# Allegro board ROHM_SENSORSHLD1-EVK-101_BRD_REV01_2015-09-25.brd
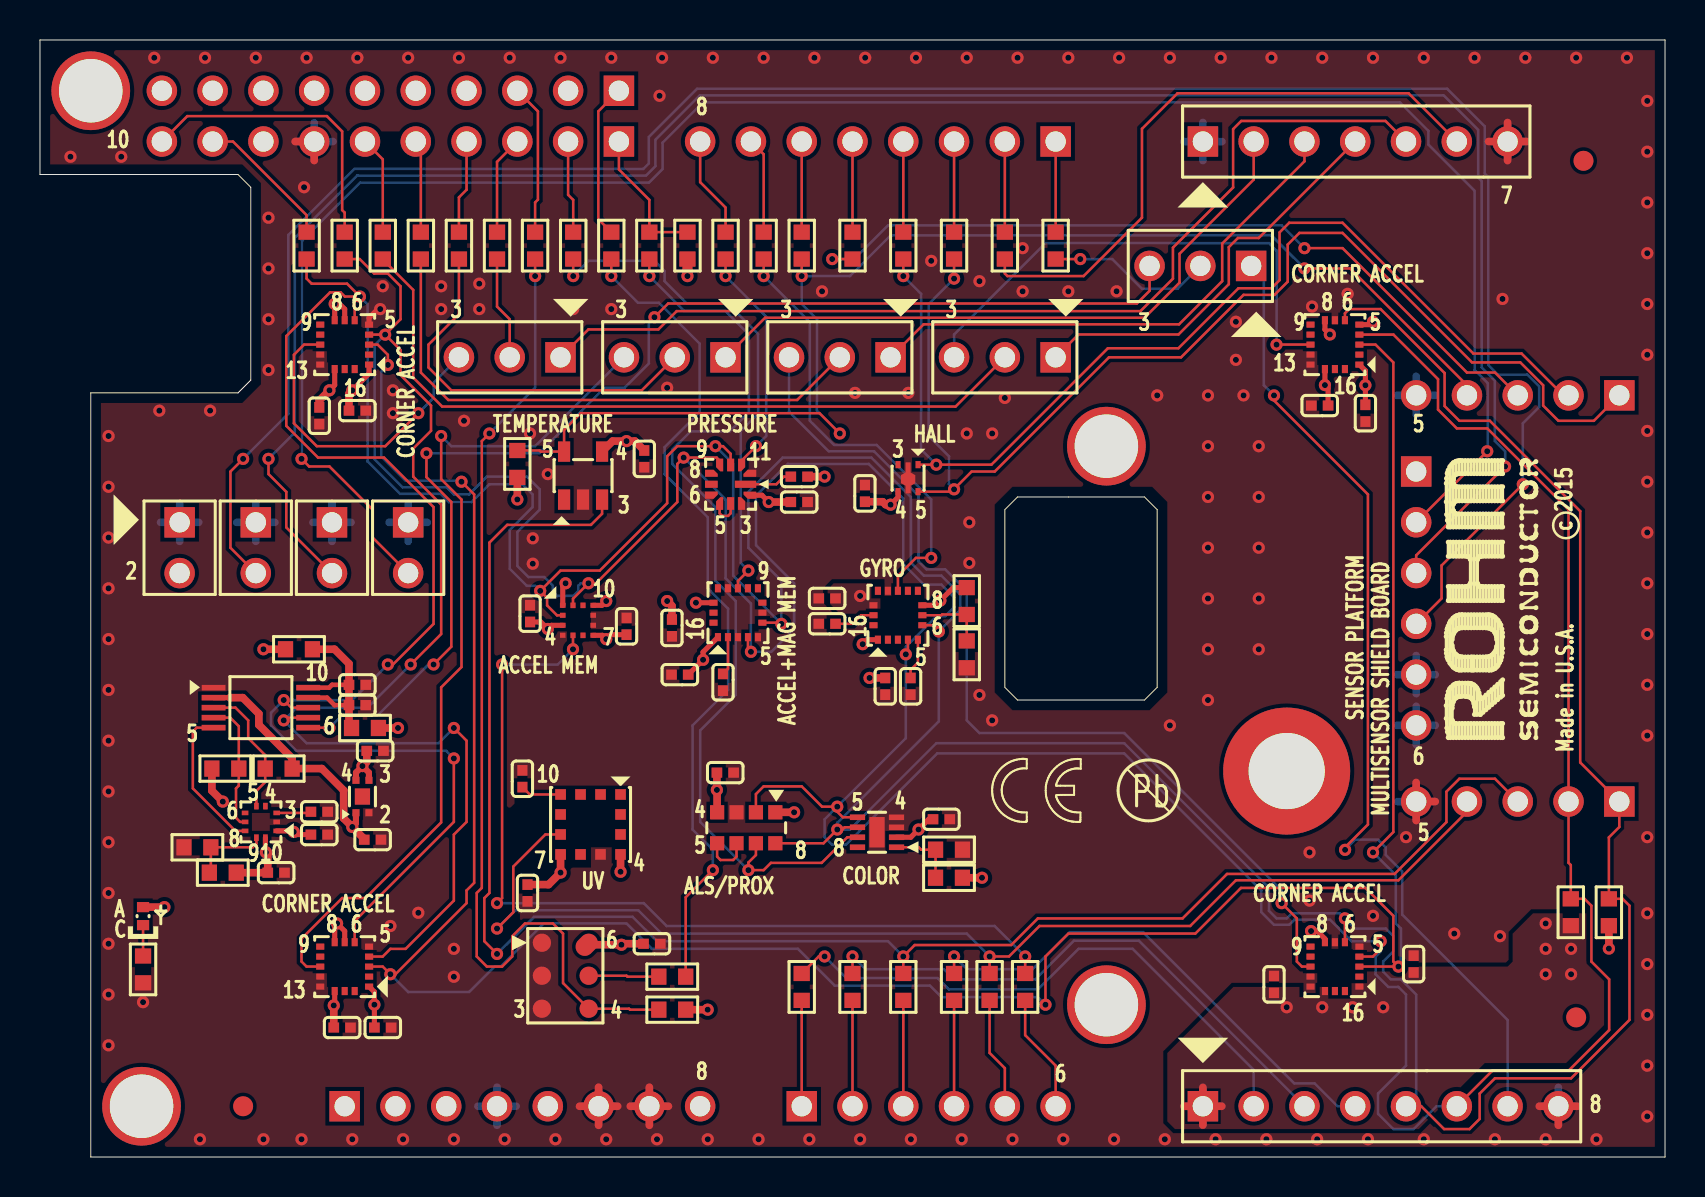
[diagram p0: board, top side]
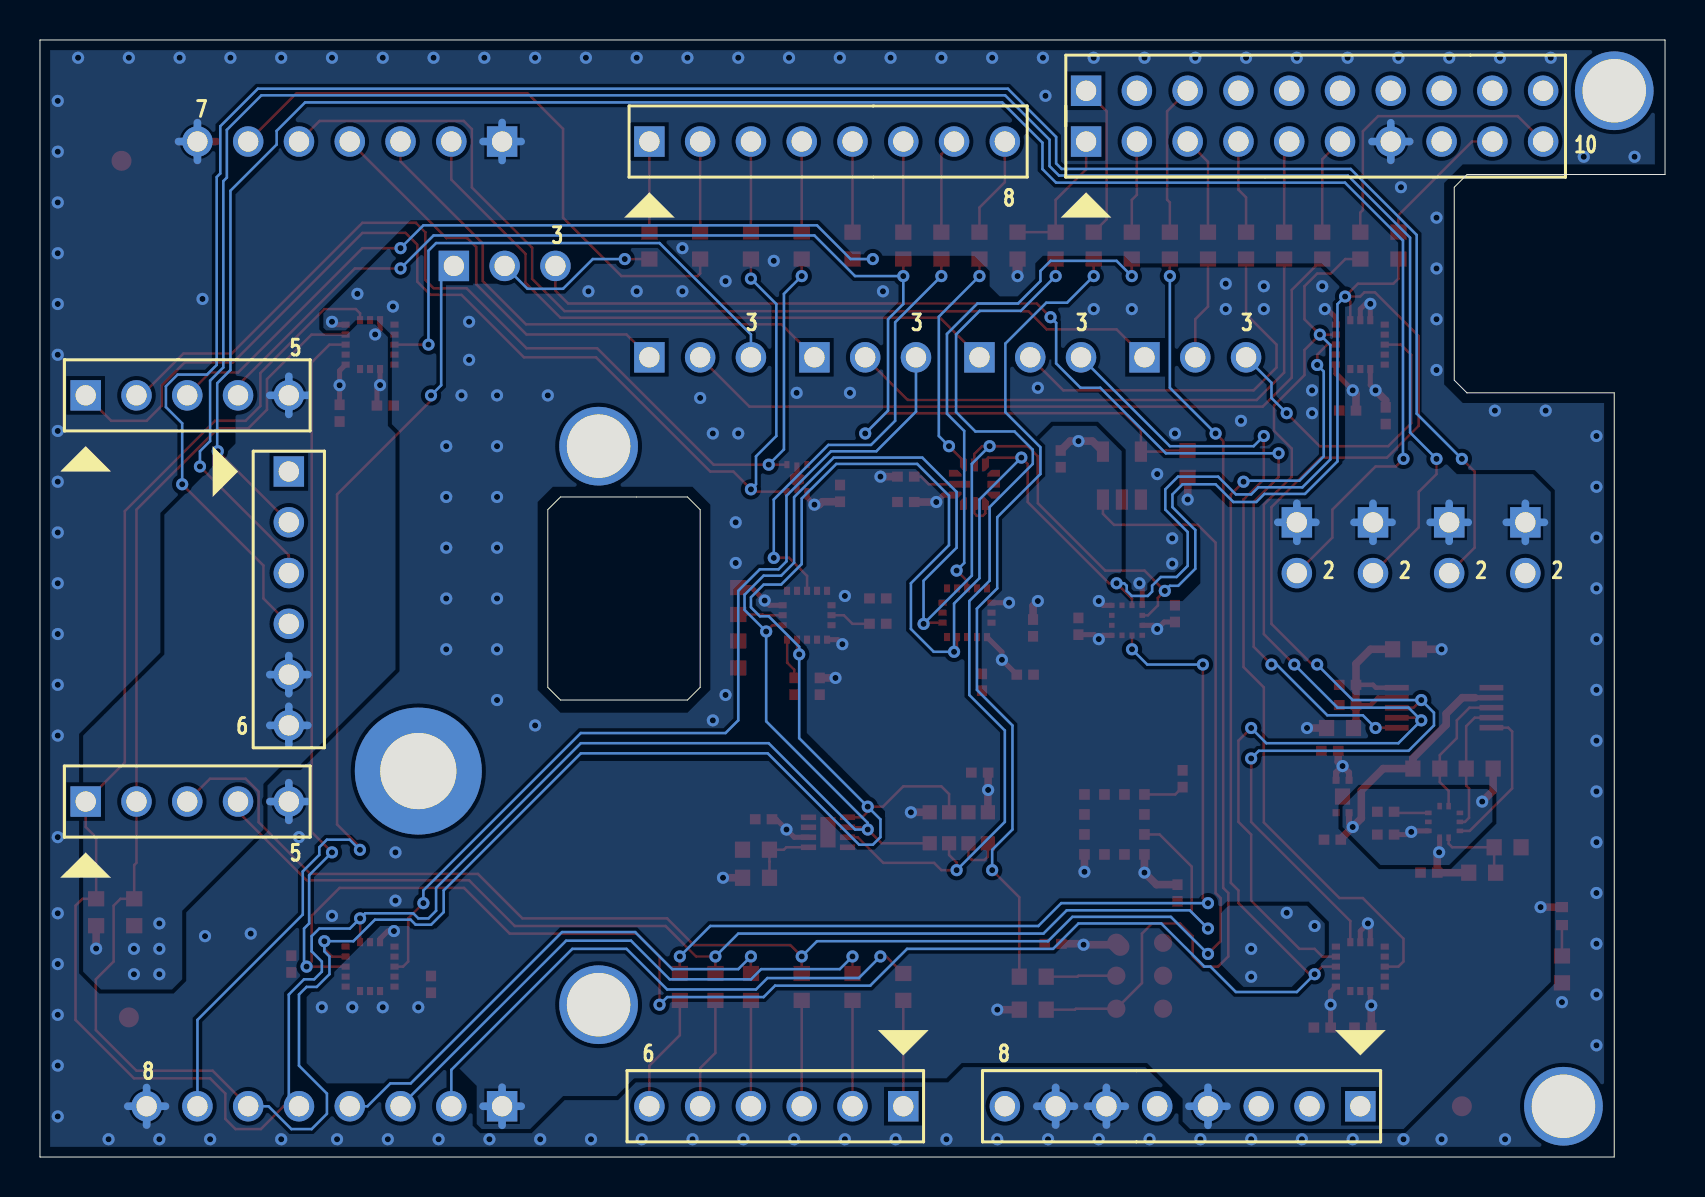
[diagram p1: board, bottom side, seen from below]

Outline 81.28 x 55.88 mm; copper layers: TOP, BOTTOM. Coordinates in mm from the lower left corner of the outline.
Outline path: 0,49.15 0,55.88 81.28,55.88 81.28,0 2.54,0 2.54,38.23 9.91,38.23 10.54,38.86 10.54,48.51 9.91,49.15 0,49.15 ; 48.26,32.38 48.89,33.02 55.24,33.02 55.88,32.38 55.88,23.5 55.24,22.86 48.89,22.86 48.26,23.5 48.26,32.38

## Placement (name value [footprint] x y rotation side)
C1  0.1uF  [C0402]  30.23 34.92 270 top
C2  0.1uF  [C0402]  37.97 34.04 180 top
C3  0.1uF  [C0402]  37.97 32.77 0 top
C5  0.1uF  [C0402]  41.26 33.2 90 top
C6  0.1uF  [C0402]  24.38 13.21 270 top
C7  1nF  [C0402]  24.13 18.92 90 top
C8  0.47uF  [C0402]  34.28 19.23 0 top
C9  0.1uF  [C0402]  45.09 16.9 0 top
C10  0.1uF  [C0402]  32 24.13 180 top
C11  0.1uF  [C0402]  31.61 26.47 270 top
C12  1uF  [C0402]  34.16 23.75 270 top
C13  0.1uF  [C0402]  24.51 27.18 90 top
C14  0.1uF  [C0402]  29.34 26.55 270 top
C17  0.1uF  [C0402]  42.28 23.55 90 top
C19  2.2nF  [C0402]  39.37 26.68 180 top
C21  0.1uF  [C0402]  39.37 27.95 180 top
C22  10nF  [C0402]  43.55 23.55 90 top
C23  0.1uF  [C0402]  30.61 10.67 180 top
C24  0.1uF  [C0402]  15.88 37.34 0 top
C25  0.1uF  [C0402]  13.97 37.08 270 top
C26  0.1uF  [C0402]  17.14 6.48 0 top
C27  0.1uF  [C0402]  15.11 6.48 0 top
C28  0.1uF  [C0402]  68.71 9.65 90 top
C29  0.1uF  [C0402]  61.72 8.64 90 top
C30  0.1uF  [C0402]  66.29 37.21 270 top
C31  0.1uF  [C0402]  64.01 37.59 180 top
C32  1uF  [C0402]  13.97 16.13 180 top
C33  1uF  [C0402]  11.81 14.22 180 top
C34  1uF  [C0402]  13.97 17.27 180 top
C35  1uF  [C0402]  16.76 20.32 180 top
C36  1uF  [C0402]  15.88 23.62 0 top
C37  1uF  [C0402]  16.64 15.88 180 top
C38  1uF  [C0402]  15.88 22.61 0 top
D1  SML-P11VTT86  [LED0402]  5.16 12.05 90 top
H1  SensorInterfaceHeader_1  [HDR_THVT_1X5_100]  78.99 38.1 180 bottom
H2  SensorInterfaceHeader_2  [HDR_THVT_1X5_100]  78.99 17.78 180 bottom
H3  SensorInterfaceHeader_3  [HDR_THVT_1X6_100]  68.83 34.29 270 bottom
H4  Header_Ard_Power  [HDR_THVT_1X8_100]  15.24 2.54 0 bottom
H5  Header_Ard_AnalogIn  [HDR_THVT_1X6_100]  38.1 2.54 0 bottom
H6  Header_Ard_Digital1  [HDR_THVT_1X8_100]  50.8 50.8 180 bottom
H7  Header_Ard_Digital2  [HDR_THVT_1X10_100]  28.96 50.8 180 bottom
H8  ExpansionHeader_I2C+ADC  [HDR_THVT_1X8_100]  58.17 2.54 0 top
H9  ExpansionHeader_SPI  [HDR_THVT_1X7_100]  58.17 50.8 0 top
H10  Header_Ard_Digital2_TopSide  [HDR_THVT_1X10_100]  28.96 53.34 180 bottom
H11  3PinHeader  [HDR_THVT_1X3_100]  26.04 40.01 180 top
H12  3PinHeader  [HDR_THVT_1X3_100]  34.29 40.01 180 top
H13  3PinHeader  [HDR_THVT_1X3_100]  42.55 40.01 180 top
H14  3PinHeader  [HDR_THVT_1X3_100]  50.8 40.01 180 top
H15  3PinHeader  [HDR_THVT_1X3_100]  60.58 44.58 180 top
J1  2-Pin Header  [HDR_THVT_1X2_100]  6.99 31.75 270 top
J2  2-Pin Header  [HDR_THVT_1X2_100]  10.8 31.75 270 top
J3  2-Pin Header  [HDR_THVT_1X2_100]  14.61 31.75 270 top
J4  2-Pin Header  [HDR_THVT_1X2_100]  18.41 31.75 270 top
NOREF  -  [unnamed]  53.34 7.62 0 top
NOREF#2  -  [#2]  6.1 53.34 0 top
NOREF#3  -  [unnamed#3]  76.84 6.99 90 top
NOREF#4  -  [unnamed#2]  62.36 19.31 0 top
NOREF#5  -  [unnamed]  5.08 2.54 0 top
NOREF#6  -  [#2]  58.17 2.54 0 top
NOREF#7  -  [#2]  26.42 50.8 0 top
NOREF#8  -  [#2]  33.02 50.8 0 top
NOREF#9  -  [unnamed#3]  10.16 2.54 90 top
NOREF#10  -  [#2]  15.24 2.54 0 top
NOREF#11  -  [#2]  48.26 50.8 0 top
NOREF#12  -  [#2]  -128.63 -237.11 0 top
NOREF#13  -  [#2]  6.1 50.8 0 top
NOREF#14  -  [unnamed]  53.34 35.56 0 top
NOREF#15  -  [#2]  -27.15 -36.65 0 top
NOREF#16  -  [#2]  58.17 2.54 0 top
NOREF#17  -  [unnamed#3]  77.2 49.84 90 top
NOREF#18  -  [unnamed]  2.54 53.34 0 top
NOREF#19  -  [#2]  15.24 2.54 0 top
NOREF#20  -  [#2]  58.17 50.8 0 top
NOREF#21  -  [#2]  58.17 50.8 0 top
NOREF#22  -  [#2]  26.42 53.34 0 top
R1  10k  [R0603]  23.88 34.67 90 top
R8  10k  [R0603]  78.47 12.24 270 top
R9  10k  [R0603]  76.57 12.24 270 top
R10  10k  [R0603]  32.38 45.59 270 top
R11  0  [R0603]  15.24 45.59 270 top
R12  0  [R0603]  13.34 45.59 270 top
R13  0  [R0603]  17.14 45.59 270 top
R14  0  [R0603]  19.05 45.59 270 top
R15  0  [R0603]  20.95 45.59 270 top
R16  0  [R0603]  22.86 45.59 270 top
R17  0  [R0603]  26.67 45.59 270 top
R18  0  [R0603]  30.48 45.59 270 top
R19  0  [R0603]  34.29 45.59 270 top
R20  0  [R0603]  36.2 45.59 270 top
R21  0  [R0603]  38.1 45.59 270 top
R22  0  [R0603]  40.64 45.59 270 top
R23  0  [R0603]  43.18 45.59 270 top
R24  0  [R0603]  45.72 45.59 270 top
R25  0  [R0603]  48.26 45.59 270 top
R26  0  [R0603]  50.8 45.59 270 top
R27  0  [R0603]  38.1 8.51 90 top
R28  0  [R0603]  40.64 8.51 90 top
R29  0  [R0603]  43.18 8.51 90 top
R30  0  [R0603]  45.72 8.51 90 top
R31  0  [R0603]  47.5 8.51 90 top
R32  0  [R0603]  49.28 8.51 90 top
R33  0  [R0603]  28.57 45.59 90 top
R34  10k  [R0603]  46.35 25.15 270 top
R35  22  [R0603]  31.63 9.02 0 top
R36  10k  [R0603]  5.16 9.38 90 top
R37  10k  [R0603]  45.47 15.37 0 top
R38  10k  [R0603]  31.63 7.37 180 top
R39  0  [R0603]  24.77 45.59 90 top
R40  0  [R0603]  45.47 13.97 180 top
R41  0  [R0603]  46.35 27.81 270 top
R42  200k  [R0603]  12.95 25.4 180 top
R43  10k  [R0603]  11.94 19.43 180 top
R44  0  [R0603]  9.14 14.22 0 top
R45  10k  [R0603]  7.87 15.49 0 top
R46  10k  [R0603]  9.27 19.43 0 top
R47  0  [R0603]  16.26 21.46 0 top
U1  BDE0600G  [SSOP5]  27.16 34.09 180 top
U2  -  [BM1383GLV]  34.54 33.66 270 top
U4  BU52014HFV  [HVSOF5]  43.42 33.96 0 top
U5  ML8511  [TQFN12]  27.54 16.64 180 top
U6  RPR-0521  [IC_3P94X2P36]  35.32 16.47 180 top
U7  -  [BH1745NUC]  41.87 16.25 90 top
U8  KMX62  [LGA_3X3X0P9]  34.91 27.23 0 top
U9  KX122  [LGA_2X2X0P9]  26.91 26.85 0 top
U11  KXG03  [LGA_3X3X0P9]  42.91 27.1 0 top
U12  SPM0423HD4H-WB  [IC_4P72X3P76]  26.28 9.07 0 top
U13  EVAL-KXCJK-1013  [LGA_3X3X0P9]  15.24 40.64 90 top
U14  EVAL-KXCJK-1013  [LGA_3X3X0P9]  15.24 9.53 90 top
U15  EVAL-KXCJK-1013  [LGA_3X3X0P9]  64.77 9.53 90 top
U16  EVAL-KXCJK-1013  [LGA_3X3X0P9]  64.77 40.64 90 top
U17  BM1422GMV  [MLLGA010V020A]  11.05 16.76 180 top
U18  NVT2003DP,118  [TSSOP10]  11.05 22.48 0 top
U19  BU18TA2WNVX-TR  [4SSON-EP]  16.13 18.03 90 top

## Library data of the parts
C1-C3 C5-C14 C17 C19 C21-C38 = C_2
D1 = LED_0
H1 = SensorInterfaceHeader_1
H2 = SensorInterfaceHeader_2
H3 = SensorInterfaceHeader_3
H4 = Header_Ard_Power_0
H5 = Header_Ard_AnalogIn
H6 = Header_Ard_Digital1_0
H7 = Header_Ard_Digital2
H8 = ExpansionHeader_I2C+ADC_0
H9 = ExpansionHeader_SPI_0
H10 = Header_Ard_Digital2_TopSide
H11-H15 = 3PinHeader
J1-J4 = 2-Pin Header
R1 R8-R47 = R
U1 = HVSOF5_3
U2 = BM1383GLV
U4 = HVSOF5_1
U5 = C-TQFN12-4.0x3.7-1_5.00
U6 = RPR-0521_0
U7 = BH1745NUC_1
U8 = LGA_3.9
U9 = KX122
U11 = KXG03
U12 = SPM0423HD4H-WB
U13-U16 = KXCJK
U17 = BM1422GMV
U18 = NVT2003DP,118
U19 = BU18TA2WNVX-TR

## Footprints (pads in the part's own frame, mm; a bottom-side part is the same pattern mirrored in y, then rotated)
4SSON-EP
  rect 0.813x0.762 smd: (0,0)
  rect 0.356x0.356 smd: 1(-0.812,0.325) 2(-0.812,-0.325) 3(0.812,-0.325) 4(0.812,0.325)
BH1745NUC
  rect 0.279x0.762 smd: 1(-0.75,-0.977) 2(-0.25,-0.977) 3(0.25,-0.977) 4(0.75,-0.977) 5(0.75,0.977) 6(0.25,0.977) 7(-0.25,0.977) 8(-0.75,0.977)
  rect 1.524x0.762 smd: 9(0,0)
BM1383GLV
  rect 0.356x1.067 smd: 1(0,0.747)
  custom 0.356x0.635 smd: 2(0.55,0.963) 6(0.55,-0.963) 8(-0.55,-0.963) 12(-0.55,0.963)
  custom 0.635x0.356 smd: 3(0.963,0.55) 5(0.963,-0.55) 9(-0.963,-0.55) 11(-0.963,0.55)
  rect 0.635x0.356 smd: 4(0.963,0) 10(-0.963,0)
  rect 0.356x0.635 smd: 7(0,-0.963)
C0402
  rect 0.533x0.508 smd: 1(-0.419,0) 2(0.419,0)
HDR_THVT_1X2_100
  rect 1.524x1.524 hole 1.016: 1(0,0)
  round 1.524 hole 1.016: 2(2.54,0)
HDR_THVT_1X3_100
  rect 1.524x1.524 hole 1.016: 1(0,0)
  round 1.524 hole 1.016: 2(2.54,0) 3(5.08,0)
HDR_THVT_1X5_100
  rect 1.524x1.524 hole 1.016: 1(0,0)
  round 1.524 hole 1.016: 2(2.54,0) 3(5.08,0) 4(7.62,0) 5(10.16,0)
HDR_THVT_1X6_100
  rect 1.524x1.524 hole 1.016: 1(0,0)
  round 1.524 hole 1.016: 2(2.54,0) 3(5.08,0) 4(7.62,0) 5(10.16,0) 6(12.7,0)
HDR_THVT_1X7_100
  rect 1.524x1.524 hole 1.016: 1(0,0)
  round 1.524 hole 1.016: 2(2.54,0) 3(5.08,0) 4(7.62,0) 5(10.16,0) 6(12.7,0) 7(15.24,0)
HDR_THVT_1X8_100
  rect 1.524x1.524 hole 1.016: 1(0,0)
  round 1.524 hole 1.016: 2(2.54,0) 3(5.08,0) 4(7.62,0) 5(10.16,0) 6(12.7,0) 7(15.24,0) 8(17.78,0)
HDR_THVT_1X10_100
  rect 1.524x1.524 hole 1.016: 1(0,0)
  round 1.524 hole 1.016: 2(2.54,0) 3(5.08,0) 4(7.62,0) 5(10.16,0) 6(12.7,0) 7(15.24,0) 8(17.78,0) 9(20.32,0) 10(22.86,0)
HVSOF5
  rect 0.254x0.356 smd: 1(0.5,0.675) 3(-0.5,0.675) 4(-0.5,-0.675) 5(0.5,-0.675)
  custom 0.711x1.549 smd: 2(0,0.015)
IC_3P94X2P36
  rect 0.711x0.711 smd: 1(-1.455,-0.775) 2(-0.485,-0.775) 3(0.485,-0.775) 4(1.455,-0.775) 5(1.455,0.775) 6(0.485,0.775) 7(-0.485,0.775) 8(-1.455,0.775)
IC_4P72X3P76
  round 0.914 smd: 1(-1.17,1.65) 2(-1.17,0) 3(-1.17,-1.65) 4(1.17,-1.65) 5(1.17,0)
  oval 1.194x0.914 smd rot 45: 6(1.07,1.55)
LED0402
  rect 0.508x0.61 smd: A(0.45,0) C(-0.45,0)
LGA_2X2X0P9
  rect 0.279x0.254 smd: 1(-0.763,0.75) 2(-0.763,0.25) 3(-0.763,-0.25) 4(-0.763,-0.75) 7(0.763,-0.75) 8(0.763,-0.25) 9(0.763,0.25) 10(0.763,0.75)
  rect 0.254x0.279 smd: 5(-0.25,-0.75) 6(0.25,-0.75) 11(0.25,0.75) 12(-0.25,0.75)
LGA_3X3X0P9
  rect 0.305x0.406 smd: 1(-1,-1.222) 2(-0.5,-1.222) 3(0,-1.222) 4(0.5,-1.222) 5(1,-1.222) 9(1,1.222) 10(0.5,1.222) 11(0,1.222) 12(-0.5,1.222) 13(-1,1.222)
  rect 0.406x0.305 smd: 6(1.222,-0.5) 7(1.222,0) 8(1.222,0.5) 14(-1.222,0.5) 15(-1.222,0) 16(-1.222,-0.5)
MLLGA010V020A
  rect 0.33x0.229 smd: 1(-0.79,0.45) 2(-0.79,0) 3(-0.79,-0.45) 6(0.79,-0.45) 7(0.79,0) 8(0.79,0.45)
  rect 0.229x0.33 smd: 4(-0.225,-0.79) 5(0.225,-0.79) 9(0.225,0.79) 10(-0.225,0.79)
R0603
  rect 0.762x0.813 smd: 1(-0.673,0) 2(0.673,0)
SSOP5
  rect 0.61x1.016 smd: 1(0.95,1.2) 2(0,1.2) 3(-0.95,1.2) 4(-0.95,-1.2) 5(0.95,-1.2)
TQFN12
  rect 0.533x0.533 smd: 1(-1.5,-1.5) 2(-1.5,-0.5) 3(-1.5,0.5) 4(-1.5,1.5) 5(-0.5,1.5) 6(0.5,1.5) 7(1.5,1.5) 8(1.5,0.5) 9(1.5,-0.5) 10(1.5,-1.5) 11(0.5,-1.5) 12(-0.5,-1.5)
TSSOP10
  rect 1.194x0.279 smd: 1(-2.366,1) 2(-2.366,0.5) 3(-2.366,0) 4(-2.366,-0.5) 5(-2.366,-1) 6(2.366,-1) 7(2.366,-0.5) 8(2.366,0) 9(2.366,0.5) 10(2.366,1)
unnamed
  round 3.937 hole 3.175: (0,0)
unnamed#2
  round 6.35 hole 3.81: (0,0)
unnamed#3
  round 1 smd: 1(0,0)

## Nets
1.8V: C32.2 C33.2 C37.2 R43.1 R44.2 R46.1 U17.1(AVDD) U17.10(DVDD) U18.2(VREFA) U19.1(VOUT)
GND: C1.2 C3.2 C5.2 C6.2 C7.2 C8.2 C9.2 C10.2 C11.2 C12.2 C13.2 C14.1 C17.1 C19.2 C21.2 C22.1 C23.1 C24.2 C25.2 C26.2 C27.2 C28.2 C29.2 C30.2 C31.2 C32.1 C33.1 C34.1 C35.1 C36.2 C37.1 C38.2 H2.5(GND) H4.6(GND) H4.7(GND1) H7.7(GND) H8.8(GND) H9.7(GND) R34.2 R36.1 R37.2 R45.1 U1.2(GND) U2.3(VSS) U2.6(TEST1) U2.12(TEST0) U4.2(GND) U5.5(GND) U6.3(GND) U7.3(GND) U7.4(TEST) U7.9(TD) U8.3(GND#3) U8.5(GND#5) U8.7(ADDR) U8.12(GND#12) U9.1(ADDR) U9.4(TRIG) U9.8(GND0) U9.9(GND1) U11.12(VSS) U12.1(GND0) U12.2(SEL) U12.3(GND1) U13.5(GND#5) U13.12(GND#12) U13.13(NC2) U14.5(GND#5) U14.12(GND#12) U14.13(NC2) U15.5(GND#5) U15.7(ADDR) U15.12(GND#12) U15.13(NC2) U16.5(GND#5) U16.7(ADDR) U16.12(GND#12) U16.13(NC2) U17.2(GND) U18.1(GND) U19.2(GND)
VDD: C1.1 C2.1 C3.1 C5.1 C6.1 C8.1 C9.1 C10.1 C11.1 C13.1 C14.2 C17.2 C21.1 C23.2 C24.1 C25.1 C26.1 C27.1 C28.1 C29.1 C30.1 C31.1 C35.2 D1.A(ANODE) H1.5(VDD) H3.5(SENSCTRL4) H3.6(SENSCTRL5) H4.4(3.3V) H8.1(VDD) H9.1(VDD) J1.1 J2.1 J3.1 J4.1 R1.1 R8.2 R9.2 R10.2 R38.1 R40.1 R41.1 R42.2 R47.2 U1.4(VDD) U2.2(VDD) U4.4(VDD) U5.4(EN) U5.7(VDD) U6.1(VDD) U6.4(LEDA) U7.2(VCC) U8.1(VDDIO) U8.14(VDD) U9.3(IO_VDD) U9.7(VDD) U9.10(NCS) U11.1(VDDIO) U11.8(CS_B) U11.14(VDD) U12.6(VDD) U13.1(VDDIO) U13.7(ADDR) U13.8(RSVD0) U13.14(VDD) U14.1(VDDIO) U14.7(ADDR) U14.8(RSVD0) U14.14(VDD) U15.1(VDDIO) U15.8(RSVD0) U15.14(VDD) U16.1(VDDIO) U16.8(RSVD0) U16.14(VDD) U19.3(STBY) U19.4(VIN)
ADC0: H2.3(ADC0) R29.2 U1.3(VTEMP)
ADC1: H2.4(ADC1) R31.2 U5.8(OUT)
DMIC_CLK: R38.2 R39.1 U12.4(CLK)
DMIC_DATA: R33.1 R35.2
EXP_ADC1: H8.2(ADC0) R27.2
EXP_ADC2: H8.3(ADC1) R28.2
EXP_ADC3: H8.4(ADC2) R30.2
EXP_GPIO0: H8.7(GPIO0) H15.1
EXP_GPIO1: H9.6(GPIO1) R25.2
EXP_MISO: H9.3(MISO) H13.1
EXP_MOSI: H9.2(MOSI) H12.1
EXP_SCK: H9.4(SCK) H14.1
EXP_SS: H9.5(SS) H11.1
FUNC1: H11.2 R16.2
FUNC2: H12.2 R15.2
FUNC3: H13.2 R14.2
FUNC4: H14.2 R13.2
FUNC5: H15.2 R26.2
GPIO0: H1.1(GPIO0) R24.2 U4.5(OUT1)
GPIO1: H1.2(GPIO1) R23.2 U4.1(OUT2)
GPIO2: H1.3(GPIO2) R22.2
GPIO3: H1.4(GPIO3) R1.2 R21.2 U1.5(OS)
INT_BM1383: R19.2 U2.11(INT)
INT_KMX62: R17.2 U8.11(INT1)
INT_KX122: R32.2 U9.5(INT1)
INT_KXCJK1: H11.3 U13.11(INT1)
INT_KXCJK2: H12.3 U14.11(INT1)
INT_KXCJK3: H13.3 U15.11(INT1)
INT_KXCJK4: H14.3 U16.11(INT1)
INT_KXG03: R20.2 U11.11(INT1)
INT_MAG: H15.3 U18.6(B3)
INT_OPTICAL: R18.2 U6.7(INT) U7.7(INT)
LSB0: H3.1(SENSCTRL0)
LSB1: H3.2(SENSCTRL1) J4.2
LSB2: H3.3(SENSCTRL2) J3.2
LSB3: H3.4(SENSCTRL3) J2.2
LSB4: J1.2
NC1: U13.3(NC1) U14.3(NC1) U15.3(NC1) U16.3(NC1)
SCL: H2.2(SCL) H8.6(SCL) R9.1 R11.2 U2.9(SCL) U6.2(SCL) U7.5(SCL) U8.4(SCL) U9.12(SCL) U11.4(SCLK_SCL) U13.4(SCL) U14.4(SCL) U15.4(SCL) U16.4(SCL) U18.7(B2)
SDA: H2.1(SDA) H8.5(SDA) R8.1 R12.2 U2.10(SDA) U6.8(SDA) U7.6(SDA) U8.6(SDA) U9.2(SDA) U11.6(MOSI_SDA) U13.6(SDA) U14.6(SDA) U15.6(SDA) U16.6(SDA) U18.8(B1)
N14002690: C12.1 U8.2(CAP)
N14009218: C7.1 U5.10(TR)
N14013380: U6.5(LEDK) U6.6(LDR)
N14046481: R37.1 R40.2 U7.1(ADDR)
N14046877: U2.4(TIN) U2.5(TOUT)
N14048054: C2.2 U2.1(DREG)
N14096363: D1.C(CATHODE) R36.2
N14097558: H7.10(SCL) R11.1
N14097562: H7.9(SDA) R12.1
N14097578: H7.5(12) R14.1
N14097590: H7.4(11) R15.1
N14097622: H7.3(10) R16.1
N14097634: H7.2(9) R17.1
N14097646: H7.1(8) R10.1 R18.1
N14098075: H6.8 R19.1
N14098079: H6.7 R20.1
N14098086: H6.6 R21.1
N14098098: H6.5 R22.1
N14098110: H6.4 R23.1
N14098122: H6.3 R24.1
N14098134: H6.2(2/TX) R25.1
N14098146: H6.1(1/RX) R26.1
N14098493: H5.1(A0) R27.1
N14098497: H5.2(A1) R28.1
N14098504: H5.3(A2) R29.1
N14098516: H5.4(A3) R30.1
N14098528: H5.5(A4) R31.1
N14098540: H5.6(A5) R32.1
N14105342: C19.1 U11.15(CPOUT)
N14105886: C22.2 U11.5(VCO_CP)
N14107068: R34.1 R41.2 U11.7(MISO_ADDR)
N14121723: H7.6(13) R13.1
N14122965: H10.3(DMIC_CLK) R39.2
N14126545: R35.1 U12.5(DATA)
N14207646: C34.2 U17.3(VREG)
N14208918: R46.2 U17.7(SCL) U18.4(A2)
N14209514: U17.8(DRDY) U18.5(A3)
N14210198: R44.1 R45.2 U17.9(ADDR)
N14210289: R43.2 U17.5(SDA) U18.3(A1)
N14216212: C36.1 C38.1 R42.1 R47.1 U18.9(VREFB) U18.10(EN)
N141214550: H10.1(DMIC_DATA) R33.2

Pads without a net: H4 1 2 3 5 8; H7 8; H10 2 4 5 6 7 8 9 10; NOREF#3 1; NOREF#9 1; NOREF#17 1; U1 1; U2 7 8; U4 3; U5 1 2 3 6 9 11 12; U7 8; U8 8 9 10 13 15 16; U9 6 11; U11 2 3 9 10 13 16; U13 2 9 10 15 16; U14 2 9 10 15 16; U15 2 9 10 15 16; U16 2 9 10 15 16; U17 4 6

## Via types
v1: diameter 0.61, hole 0.305, TOP to BOTTOM, 292 vias

## Routing (per net, layer and track width the routed paths; a pad name or vN(x,y) marks a point on that pad's centre or on a via; arc(x,y) is an arc through that point)
1.8V: length 19.8
  TOP w0.254: 9.5,22.98 U18.2 ; U17.1 12.64,16.31 v1(12.69,16.26) 12.83,16.13 C32.2 ; U17.10 11.27,15.27 v1(11.3,15.24)
  TOP w0.305: U19.1 15.8,16.69 v1(15.62,16.51)
  TOP w0.381: v1(11.3,15.24) 11.39,15.15 C33.2 R44.2 ; R46.1 8.6,18.33 v1(9.14,17.78) ; 9.5,22.98 10.14,22.98 10.95,22.17 10.95,21.62 12.61,19.95 R43.1 14.1,19.43 15.19,18.34 15.19,16.94 v1(15.62,16.51) 16.22,15.91 C37.2
GND: length 43.7
  TOP w0.254: U9.1 26.15,28.56 v1(26.29,28.7) ; v1(66.68,41.78) 66.53,41.64 U16.5 ; v1(17.02,42.42) 16.89,42.42 16.46,41.99 U13.5
  TOP w0.381: 26.99,2.54 H4.6 ; H4.6 28.89,2.54 ; H4.6 27.94,1.59 ; H4.6 27.94,3.49 ; H4.7 30.48,3.49 ; H4.7 29.53,2.54 ; H4.7 30.48,1.59 ; H4.7 31.43,2.54 ; H9.7 73.41,51.75 ; H9.7 73.41,49.85 ; H9.7 72.45,50.8 ; H9.7 74.36,50.8 ; H2.5 68.83,18.74 ; H2.5 69.79,17.78 ; H2.5 68.83,16.83 ; 75.95,1.59 H8.8 ; H8.8 76.9,2.54 ; H8.8 74.99,2.54 ; 12.76,50.8 H7.7 13.72,49.85
  BOTTOM w0.381: H8.8 76.89,2.54 ; H8.8 75.95,1.6 ; H8.8 75.01,2.54 ; H8.8 75.95,3.48 ; 12.78,50.8 H7.7 ; H7.7 13.72,51.74 ; H7.7 14.66,50.8 ; H7.7 13.72,49.86 ; H9.7 74.35,50.8 ; H9.7 73.41,51.74 ; H9.7 73.41,49.86 ; 29.54,2.54 H4.7 ; H4.7 30.48,3.48 ; H4.7 30.48,1.6 ; H4.7 31.42,2.54 ; H4.6 28.88,2.54 ; H4.6 27.94,3.48 ; H4.6 27.94,1.6 ; H4.6 27,2.54 ; 67.89,17.78 H2.5 ; H2.5 69.77,17.78 ; H2.5 68.83,16.84 ; H2.5 68.83,18.72
  vias: v1(1.52,50.04) v1(3.43,36.07) v1(3.43,33.53) v1(3.43,30.99) v1(3.43,28.45) v1(3.43,25.91) v1(3.43,23.37) v1(3.43,20.83) v1(3.43,18.29) v1(3.43,15.75) v1(3.43,13.21) v1(3.43,10.67) v1(3.43,8.13) v1(3.43,5.59) v1(4.06,50.04) v1(5.16,7.75) v1(5.71,54.99) v1(5.97,37.34) v1(8,0.89) v1(8.25,54.99) v1(8.51,37.34) v1(10.8,54.99) v1(11.18,0.89) v1(11.43,46.99) v1(11.43,44.45) v1(11.43,41.91) v1(11.43,39.37) v1(13.08,0.89) v1(13.21,48.51) v1(13.34,54.99) v1(15.62,0.89) v1(15.88,54.99) v1(17.14,43.56) v1(17.53,11.56) v1(17.65,38.35) v1(17.65,37.21) v1(18.16,0.89) v1(18.41,54.99) v1(18.92,12.22) v1(20.07,43.56) v1(20.07,42.42) v1(20.7,10.41) v1(20.7,9.02) v1(20.7,0.89) v1(20.95,54.99) v1(21.21,36.83) v1(21.97,43.69) v1(21.97,42.42) v1(23.24,0.89) v1(23.49,54.99) v1(24.51,36.2) v1(24.65,30.95) v1(24.65,29.68) v1(25.4,34.16) v1(25.78,0.89) v1(26.04,54.99) v1(26.67,42.42) v1(28.32,0.89) v1(28.57,54.99) v1(28.57,42.42) v1(30.86,0.89) v1(30.99,53.09) v1(31.11,54.99) v1(31.37,38.48) v1(33.4,0.89) v1(33.66,54.99) v1(35.94,0.89) v1(36.2,54.99) v1(38.48,0.89) v1(38.73,54.99) v1(39.12,43.31) v1(40.77,38.23) v1(41.02,0.89) v1(41.27,54.99) v1(43.43,38.23) v1(43.56,0.89) v1(43.81,54.99) v1(44.58,44.83) v1(46.1,0.89) v1(46.35,54.99) v1(46.35,36.2) v1(46.48,31.75) v1(46.48,29.72) v1(46.99,43.81) v1(46.99,23.11) v1(47.62,36.2) v1(47.62,21.84) v1(48.26,37.97) v1(48.64,0.89) v1(48.89,54.99) v1(49.15,45.47) v1(49.15,43.31) v1(51.18,0.89) v1(51.44,54.99) v1(51.44,43.31) v1(53.72,0.89) v1(53.85,43.31) v1(53.98,54.99) v1(55.88,38.1) v1(56.26,0.89) v1(56.52,54.99) v1(56.52,21.59) v1(58.42,38.1) v1(58.42,35.56) v1(58.42,33.02) v1(58.42,30.48) v1(58.42,27.94) v1(58.42,25.4) v1(58.42,22.86) v1(58.8,0.89) v1(59.05,54.99) v1(59.82,41.78) v1(59.82,39.88) v1(60.2,38.1) v1(60.96,35.56) v1(60.96,33.02) v1(60.96,30.48) v1(60.96,27.94) v1(60.96,25.4) v1(61.34,0.89) v1(61.59,54.99) v1(63.5,15.24) v1(63.5,12.83) v1(63.63,42.55) v1(63.88,0.89) v1(64.14,54.99) v1(65.41,43.18) v1(66.42,0.89) v1(66.68,54.99) v1(66.68,12.06) v1(68.33,16) v1(69.22,54.99) v1(69.22,0.89) v1(70.74,11.18) v1(71.76,54.99) v1(72.77,0.89) v1(73.03,11.05) v1(73.15,42.93) v1(74.3,54.99) v1(75.31,0.89) v1(76.84,54.99) v1(77.85,0.89) v1(79.38,54.99) v1(80.39,52.83) v1(80.39,50.29) v1(80.39,47.75) v1(80.39,45.21) v1(80.39,42.67) v1(80.39,40.13) v1(80.39,36.32) v1(80.39,33.78) v1(80.39,31.24) v1(80.39,28.7) v1(80.39,26.16) v1(80.39,23.62) v1(80.39,21.08) v1(80.39,16) v1(80.39,12.19) v1(80.39,9.65) v1(80.39,7.11) v1(80.39,4.57) v1(80.39,2.03)
VDD: length 104.1
  TOP w0.254: U14.8 14.74,11.57 v1(14.86,11.68) 15.24,11.3 U14.7 ; U9.7 28.13,26.1 v1(28.32,25.91) 28.54,26.13 C14.2 ; U16.1 66.29,39.34 v1(66.29,38.61) C30.1 ; U7.2 43.55,16 v1(43.94,16.38) 44.46,16.9 C9.1 ; U9.10 28.11,27.6 v1(28.32,27.81) ; U11.1 41.37,25.88 v1(41.15,25.65) ; U4.4 42.92,33.01 v1(42.55,32.63) ; U14.1 16.73,8.26 v1(16.73,7.62) C26.1 ; v1(14.69,7.58) 14.74,7.63 U14.14 ; v1(63.58,11.3) 63.88,11.3 64.27,10.91 U15.8 ; U8.14 v1(32.81,27.73) ; U16.8 64.27,41.39 v1(64.52,41.15) ; U13.8 v1(14.74,42.68) 14.98,42.68 15.24,42.42 U13.7 ; U11.8 44.8,27.6 v1(45.03,27.84) 45.68,28.49 R41.1 ; U16.14 v1(64.27,38.62) 64.43,38.46 C31.1 ; v1(14.48,38.35) 14.74,38.62 U13.14 ; U13.1 16.46,39.2 v1(15.62,38.35) ; U2.2 36.11,33.1 v1(36.45,32.77) ; U8.1 33.17,25.26 v1(33.17,24.87) C10.1 ; U9.3 25.58,26.6 v1(25.4,26.42) 25.05,26.76 C13.1
  TOP w0.305: U19.4 15.8,19.23 v1(16.13,19.56) 16.45,19.23 U19.3
  TOP w0.381: v1(15.62,38.35) 15.46,38.19 C24.1 ; H8.1 59.11,2.54 ; H8.1 58.17,1.6 ; H8.1 58.17,3.48 ; H8.1 57.23,2.54 ; C2.1 v1(39.24,34.04) ; v1(31.37,27.81) 31.61,27.57 C11.1 ; U5.7 v1(26.04,14.23) 25.44,13.63 C6.1 ; v1(42.55,32.63) 42.3,32.63 42.15,32.78 C5.1 ; C1.1 29.76,35.81 v1(29.34,35.81) 28.64,35.81 U1.4 ; C25.1 13.97,37.85 v1(14.48,38.35) ; U5.4 v1(29.04,14.27) ; R1.1 v1(23.88,32.89) ; R38.1 v1(33.4,7.37) ; v1(14.69,7.58) C27.1 ; R40.1 v1(47.12,13.97) ; R42.2 v1(11.18,25.4) ; C8.1 v1(33.86,18.36) 33.87,18.35 U6.4 ; v1(16.13,19.56) 16.34,19.77 C35.2 ; R47.2 v1(17.91,21.46) ; R8.2 v1(78.47,10.43) ; C17.2 v1(41.49,23.97) ; C3.1 v1(36.45,32.77) ; U12.6 v1(29.08,10.62) 29.14,10.67 C23.2 ; D1.A v1(6.22,12.5) ; U6.1 v1(37.72,17.24)
  TOP w0.508: v1(32.38,44.07) R10.2
  BOTTOM w0.381: 9.84,31.75 J2.1 ; J2.1 10.8,30.8 ; J2.1 10.8,32.7 ; J2.1 11.75,31.75 ; 67.88,21.59 H3.6 ; H3.6 68.83,20.64 ; H3.6 68.83,22.55 ; H3.6 69.79,21.59 ; H8.1 58.17,3.49 ; H8.1 57.21,2.54 ; H8.1 58.17,1.59 ; H8.1 59.12,2.54 ; 67.88,24.13 H3.5 ; H3.5 68.83,25.09 ; H3.5 68.83,23.18 ; H3.5 69.79,24.13 ; 58.17,49.85 H9.1 ; H9.1 58.17,51.75 ; H9.1 59.12,50.8 ; H9.1 57.21,50.8 ; H4.4 22.86,3.49 ; H4.4 22.86,1.59 ; H4.4 23.81,2.54 ; H4.4 21.91,2.54 ; 6.03,31.75 J1.1 ; J1.1 6.99,32.7 ; J1.1 6.99,30.8 ; J1.1 7.94,31.75 ; 13.65,31.75 J3.1 ; J3.1 15.56,31.75 ; J3.1 14.61,32.7 ; J3.1 14.61,30.8 ; H1.5 68.83,39.06 ; H1.5 69.79,38.1 ; H1.5 68.83,37.15 ; H1.5 67.88,38.1 ; J4.1 19.37,31.75 ; J4.1 18.41,30.8 ; J4.1 17.46,31.75 ; J4.1 18.41,32.7
  vias: v1(41.02,28.07) v1(62.36,7.49) v1(64.14,7.49) v1(65.66,7.49) v1(67.18,7.49) v1(75.31,11.68) v1(75.31,10.41) v1(75.31,9.14) v1(76.58,10.41) v1(76.58,9.14)
ADC0: length 86.4
  TOP w0.127: v1(22.86,10.16) 22.22,10.79 22.22,12.95 22.48,13.21 22.48,30.73 23.37,31.62 27.56,31.62 28.11,32.18 U1.3 ; R29.2 v1(43.18,10.03) 43.75,10.6 48.58,10.6 49.91,11.94 57.15,11.94 59.37,14.16 67.75,14.16 70.35,16.75 70.35,18.28 70.99,18.92 72.77,18.92 H2.3
  BOTTOM w0.127: v1(43.18,10.03) 42.42,10.79 30.86,10.79 29.64,12.01 24.71,12.01 v1(22.86,10.16)
ADC1: length 60.7
  TOP w0.127: v1(22.86,11.43) 23.67,12.24 23.67,14.53 25.28,16.14 U5.8 ; R31.2 v1(47.5,10.03) 48.47,10.03 49.99,11.56 57.53,11.56 59.82,13.84 67.95,13.84 71.37,17.27 H2.4
  BOTTOM w0.127: v1(47.5,10.03) 46.35,11.18 31.09,11.18 29.92,12.34 23.77,12.34 v1(22.86,11.43)
DMIC_CLK: length 50.1
  TOP w0.127: R38.2 29.51,7.37 29.46,7.42 U12.4 26.16,8.7 26.16,11.18 25.65,11.68 24.26,11.68 23.62,11.05 23.62,10.03 23.11,9.53 22.35,9.53 21.84,10.03 21.84,13.21 22.1,13.46 22.1,35.81 v1(22.48,36.2) ; R39.1 v1(24.77,44.07)
  BOTTOM w0.127: v1(22.48,36.2) 24.77,38.48 v1(24.77,44.07)
DMIC_DATA: length 42.1
  TOP w0.127: v1(33.66,14.35) 32.3,12.99 R35.2 ; R33.1 v1(28.57,44.07)
  BOTTOM w0.127: v1(28.57,44.07) 29.91,42.74 30.95,42.74 32.99,40.69 32.99,37.26 31.24,35.51 31.24,34.16 33.4,32 33.4,28.45 34.42,27.43 34.42,23.37 32.64,21.59 32.64,16.38 33.66,15.37 v1(33.66,14.35)
EXP_ADC1: length 28.8
  TOP w0.127: v1(39.24,10.03) 38.95,10.03 R27.2
  BOTTOM w0.127: H8.2 60.71,4.36 54.65,10.41 51.94,10.41 49.91,8.38 45.47,8.38 44.89,8.95 40.32,8.95 v1(39.24,10.03)
EXP_ADC2: length 28.2
  TOP w0.127: R28.2 v1(40.64,10.03)
  BOTTOM w0.127: v1(40.64,10.03) 41.27,9.4 45.21,9.4 45.72,8.89 49.78,8.89 51.71,10.82 54.97,10.82 H8.3
EXP_ADC3: length 25.6
  TOP w0.127: R30.2 v1(45.72,10.03)
  BOTTOM w0.127: H8.4 64.9,2.54 63.75,3.68 62.74,3.68 55.17,11.25 51.51,11.25 49.66,9.4 46.35,9.4 v1(45.72,10.03)
EXP_GPIO0: length 50
  TOP w0.127: v1(61.72,38.1) 61.72,37.85 66.42,33.15 66.42,16.64 65.28,15.49 v1(65.28,15.37)
  BOTTOM w0.127: H8.7 73.41,6.86 68.14,12.13 68.14,14.29 67.31,15.11 67.31,15.49 66.93,15.88 65.79,15.88 v1(65.28,15.37) ; H15.1 61.21,43.94 61.21,38.61 v1(61.72,38.1)
EXP_GPIO1: length 30.8
  TOP w0.127: R25.2 48.26,44.2 48.39,44.07 52.2,44.07 55.12,46.99 55.12,51.44 56.9,53.21 68.45,53.21 H9.6
EXP_MISO: length 26.9
  TOP w0.127: H9.3 63.25,49.81 59.13,45.69 59.13,43.81 56.97,41.66 44.2,41.66 H13.1
EXP_MOSI: length 32.9
  TOP w0.127: H12.1 36.27,41.99 55.24,41.99 57,43.74 57,45.19 60.71,48.9 H9.2
EXP_SCK: length 20.5
  TOP w0.127: H14.1 51.94,41.15 56.95,41.15 59.46,43.66 59.46,45.52 59.92,45.97 60.96,45.97 H9.4
EXP_SS: length 50.2
  TOP w0.127: H9.5 67.3,51.83 60.08,51.83 59.68,51.42 59.68,48.5 56.67,45.49 56.67,43.94 55.04,42.32 31.85,42.32 30.93,41.4 27.43,41.4 H11.1
FUNC1: length 5.2
  TOP w0.127: R16.2 22.86,42.55 23.49,41.91 H11.2
FUNC2: length 19.5
  TOP w0.127: H12.2 30.1,38.35 20.57,38.35 19.43,39.5 19.43,40.64 20.95,42.16 R15.2
FUNC3: length 28.1
  TOP w0.127: H13.2 37.87,37.87 20.42,37.87 19.05,39.24 R14.2
FUNC4: length 37.8
  TOP w0.127: H14.2 45.8,37.54 20.12,37.54 18.67,38.99 18.67,43.38 17.14,44.9 R13.2
FUNC5: length 8.3
  TOP w0.127: R26.2 v1(52.03,44.92)
  BOTTOM w0.127: v1(52.03,44.92) 53.63,44.92 55.12,43.43 56.9,43.43 H15.2
GPIO0: length 59.1
  TOP w0.127: 45.72,33.41 v1(45.72,33.4) ; 45.72,33.41 45.59,33.29 U4.5 ; 45.72,33.41 46.6,34.29 47.75,34.29 53.47,40.01 57.07,40.01 60.2,43.13 61.75,43.13 62.41,43.79 62.41,45.64 62.99,46.23 65.15,46.23 71.63,39.75 74.04,39.75 75.18,38.61 75.18,37.59 75.95,36.83 77.72,36.83 H1.1 ; R24.2 v1(45.72,43.94)
  BOTTOM w0.127: v1(45.72,33.4) 45.47,33.66 45.47,35.05 44.45,36.07 44.45,42.67 v1(45.72,43.94)
GPIO1: length 53.5
  TOP w0.127: U4.1 v1(44.83,34.64) 47.59,34.64 53.41,40.46 56.94,40.46 59.94,43.46 61.59,43.46 62,43.87 62,46.25 62.48,46.74 65.15,46.74 71.69,40.2 74.1,40.2 76.2,38.1 H1.2 ; R23.2 v1(43.18,44.07)
  BOTTOM w0.127: v1(44.83,34.64) 44.07,35.4 44.07,43.18 v1(43.18,44.07)
GPIO2: length 39.5
  TOP w0.127: v1(63.25,45.47) 65.15,45.47 71.37,39.24 72.77,39.24 H1.3 ; R22.2 v1(39.62,44.92)
  BOTTOM w0.127: v1(63.25,45.47) 62.1,46.61 42.42,46.61 40.73,44.92 v1(39.62,44.92)
GPIO3: length 65.2
  TOP w0.127: R21.2 v1(38.1,44.07) ; v1(40.01,36.2) 38.99,37.21 27.05,37.21 26.21,36.37 U1.5 25.05,35.29 25,35.34 R1.2 ; v1(63.25,44.45) 65.53,44.45 71.37,38.61 H1.4
  BOTTOM w0.127: v1(63.25,44.45) 61.59,46.1 42.55,46.1 40.51,44.07 v1(38.1,44.07) 38.1,42.67 38.86,41.91 38.86,37.34 v1(40.01,36.2)
INT_BM1383: length 11.7
  TOP w0.127: R19.2 v1(34.29,44.07) ; U2.11 35.09,34.84 v1(35.81,35.56)
  BOTTOM w0.127: v1(34.29,44.07) 36.32,42.04 36.32,36.07 v1(35.81,35.56)
INT_KMX62: length 25.7
  TOP w0.127: v1(35.43,29.34) 34.91,28.82 U8.11 ; R17.2 v1(26.67,44.07)
  BOTTOM w0.127: v1(35.43,29.34) 35.05,29.72 35.05,36.32 35.92,37.19 35.92,41.17 34.39,42.7 32.36,42.7 31.24,43.81 31.24,44.32 30.73,44.83 27.43,44.83 v1(26.67,44.07)
INT_KX122: length 45
  TOP w0.127: U9.5 v1(26.66,25.4) ; v1(23.11,24.64) 23.11,12.95 v1(22.86,12.7) ; R32.2 v1(49.28,10.03)
  BOTTOM w0.127: v1(22.86,12.7) 30.2,12.7 31.34,11.56 47.75,11.56 v1(49.28,10.03) ; v1(26.66,25.4) 25.9,24.64 v1(23.11,24.64)
INT_KXCJK1: length 16
  TOP w0.127: v1(18.92,37.21) 17.27,35.56 13.84,35.56 12.7,36.7 12.7,40.13 13.21,40.64 U13.11
  BOTTOM w0.127: v1(18.92,37.21) 19.68,37.97 19.68,38.73 H11.3
INT_KXCJK2: length 42.9
  TOP w0.127: U14.11 13.34,9.53 13.08,9.78 13.08,10.92 15.11,12.95 16.28,12.95 20.07,16.74 20.07,23.5 21.08,24.51 21.08,32.89 20.07,33.91 v1(20.07,36.07)
  BOTTOM w0.127: v1(20.07,36.07) 20.57,35.56 24.77,35.56 H12.3
INT_KXCJK3: length 47.7
  TOP w0.127: U15.11 63.12,9.53 62.87,9.78 62.87,11.94 v1(62.1,12.7)
  BOTTOM w0.127: 37.46,40.01 37.46,37.29 39.45,35.31 41.71,35.31 43.94,33.08 43.94,29.8 44.34,29.4 45.28,29.4 46.35,28.32 46.35,21.84 46.99,21.21 54.23,21.21 62.1,13.34 v1(62.1,12.7)
INT_KXCJK4: length 25.7
  TOP w0.127: v1(61.85,40.64) U16.11
  BOTTOM w0.127: H14.3 45.72,41.15 50.29,45.72 61.47,45.72 61.85,45.34 v1(61.85,40.64)
INT_KXG03: length 22.5
  TOP w0.127: v1(44.58,29.97) 43.81,29.97 42.91,29.07 U11.11 ; R20.2 v1(36.2,44.07)
  BOTTOM w0.127: v1(36.2,44.07) 38.51,41.76 38.51,36.83 39.71,35.62 41.85,35.62 44.58,32.89 v1(44.58,29.97)
INT_MAG: length 61
  TOP w0.127: U18.6 14.46,21.48 v1(14.48,21.46) ; v1(30.73,42.01) 31.42,42.7 54.86,42.7 55.5,43.33 H15.3 ; v1(19.33,35.2) 19.33,34.01 20.57,32.77 20.57,25.53 v1(19.68,24.64)
  BOTTOM w0.127: v1(14.48,21.46) 15.11,22.1 16.89,22.1 19.43,24.64 v1(19.68,24.64) ; v1(30.73,42.01) 30.45,41.73 30.45,39.7 29.24,38.48 28.24,38.48 24.97,35.2 v1(19.33,35.2)
INT_OPTICAL: length 47.3
  TOP w0.127: U7.7 40.38,16 39.1,14.72 36.56,14.72 36.2,14.35 v1(35.43,14.35) 35.43,14.73 35.81,15.11 U6.7 ; R18.2 v1(30.48,44.07)
  BOTTOM w0.127: v1(30.48,44.07) 32.22,42.33 34.28,42.33 35.46,41.15 35.46,37.26 34.49,36.3 32.54,36.3 31.62,35.38 31.62,34.67 33.78,32.51 33.78,28.83 34.8,27.81 34.8,23.11 33.02,21.34 33.02,16.76 v1(35.43,14.35)
LSB1: length 102.3
  TOP w0.127: v1(72.39,35.31) H3.2 ; J4.2 16.64,30.99 16.64,32.38 14.48,34.54 13.46,34.54 v1(13.08,34.92)
  BOTTOM w0.127: v1(13.08,34.92) 13.11,34.95 13.11,45.84 16.01,48.74 30.46,48.74 31.14,49.42 31.14,50.74 33.15,52.76 68.02,52.76 69.44,51.33 69.44,50.65 71.76,48.34 71.76,39.37 72.42,38.71 72.42,35.33 v1(72.39,35.31)
LSB2: length 106.8
  TOP w0.127: v1(11.43,34.92) 11.43,34.16 12.32,33.27 12.32,31.5 J3.2 ; H3.3 68.83,30.1 v1(73.28,34.54)
  BOTTOM w0.127: v1(73.28,34.54) 73.28,35.31 72.77,35.81 72.77,38.84 72.11,39.5 72.11,48.82 71.93,49 71.93,51.38 70.21,53.11 33,53.11 30.78,50.89 30.78,49.57 30.31,49.1 15.86,49.1 12.75,45.99 12.75,36.25 v1(11.43,34.92)
LSB3: length 112.5
  TOP w0.127: J2.2 9.53,30.48 9.53,34.29 v1(10.16,34.92) ; H3.4 70.1,27.94 70.1,29.59 v1(74.17,33.66)
  BOTTOM w0.127: v1(10.16,34.92) 12.42,37.19 12.42,46.13 15.72,49.43 30.18,49.43 30.45,49.71 30.45,51.03 32.87,53.44 70.38,53.44 72.26,51.56 72.26,49.2 72.44,49.02 72.44,39.62 72.92,39.14 74.4,39.14 74.98,38.56 74.98,37.52 74.17,36.7 v1(74.17,33.66)
NC1: length 134.9
  TOP w0.127: v1(21.08,33.78) 21.72,33.15 21.72,13.72 21.34,13.33 21.34,12.7 17.78,9.14 v1(17.53,9.14) 17.14,9.53 U14.3 ; U15.3 v1(67.95,9.53) 67.69,9.78 67.69,12.06 66.29,13.46 60.07,13.46 57.78,11.18 51.44,11.18 50.29,10.03 v1(50.29,7.62) ; U13.3 16.89,40.64 17.4,40.13 v1(17.4,39.62) ; v1(66.68,15.24) 67.69,16.26 67.69,39.75 66.8,40.64 U16.3
  BOTTOM w0.127: v1(66.68,15.24) 67.82,14.1 67.82,11.68 68.07,11.43 68.07,9.65 v1(67.95,9.53) ; v1(50.29,7.62) 49.91,8 45.09,8 44.51,8.57 39.75,8.57 37.91,10.41 30.61,10.41 29.34,11.68 25.2,11.68 23.04,9.53 22.73,9.53 21.46,8.26 18.41,8.26 v1(17.53,9.14) ; v1(21.08,33.78) 21.03,33.83 18.29,33.83 17.07,35.05 17.07,39.29 v1(17.4,39.62)
SCL: length 258.2
  TOP w0.127: U15.4 66.67,10.02 67.06,10.41 v1(67.06,10.79) ; U2.9 33.99,34.84 33.85,34.99 v1(32.19,34.99) 31.88,34.67 31.88,32.77 27.81,28.7 v1(27.43,28.7) 26.66,27.93 U9.12 ; v1(12.19,21.84) 12.33,21.98 U18.7 ; U8.4 35.41,25.42 v1(35.56,25.27) ; v1(17.26,41.14) 18.03,41.91 18.03,43.56 17.4,44.2 16.72,44.2 15.99,44.92 R11.2 ; v1(17.26,41.14) U13.4 ; v1(17.26,41.14) 18.03,40.37 18.03,39.12 19.56,37.59 19.56,36.33 18.67,35.44 18.67,34.04 20.07,32.64 20.07,26.16 v1(18.54,24.64) ; U14.4 17.14,10.02 17.53,10.41 18.29,10.41 20.7,12.83 20.7,16.13 21.34,16.76 21.34,20.83 v1(20.7,21.46) ; U6.2 35.81,18.16 36.2,18.54 38.1,18.54 39.12,17.53 v1(39.88,17.53) 39.88,17.27 40.15,17 U7.5 ; v1(43.31,25.15) 43.41,25.25 U11.4 ; H8.6 72.64,4.32 76.45,4.32 78.49,6.35 78.49,8.89 77.6,9.78 77.6,12.57 77.25,12.92 R9.1 76.57,14.61 76.45,14.72 H2.2 76.45,32.38 72.39,36.45 70.87,36.45 69.93,37.39 69.93,38.91 67.7,41.14 U16.4
  BOTTOM w0.127: v1(20.7,21.46) 19.94,20.7 13.34,20.7 v1(12.19,21.84) 12.83,22.48 16.38,22.48 v1(18.54,24.64) ; v1(17.26,41.14) 16.74,40.61 16.74,34.9 18.14,33.5 20.35,33.5 20.7,33.15 21.46,33.15 22.35,34.04 24.36,34.04 24.99,33.4 24.99,32.38 23.88,31.27 23.88,29.57 24.43,29.01 25.22,29.01 25.65,28.58 25.65,28.29 25.87,28.07 26.67,28.07 26.92,28.32 26.92,28.57 27.05,28.7 v1(27.43,28.7) ; H8.6 69.85,2.54 68.71,1.4 67.69,1.4 66.93,2.16 66.93,3.17 68.33,4.57 68.33,8.13 67.95,8.51 67.44,8.51 66.8,9.14 66.8,10.03 67.06,10.29 v1(67.06,10.79) 65.6,10.79 64.53,11.87 62.74,11.87 62.49,11.62 61.72,11.62 61.09,12.25 61.09,13.34 54.23,20.19 44.88,20.19 40.31,15.62 39.62,15.62 39.24,16 39.24,16.89 v1(39.88,17.53) 43.31,20.95 v1(43.31,25.15) 43.31,25.53 44.83,27.05 45.27,27.05 45.72,27.5 45.72,28 45.09,28.63 44.21,28.63 43.18,29.66 43.18,32.94 41.45,34.67 37.4,34.67 35.81,33.08 35.81,30.61 37.72,28.7 37.72,26.42 36.58,25.27 v1(35.56,25.27) 35.56,27.69 34.29,28.96 34.29,32.89 v1(32.19,34.99)
SDA: length 262.3
  TOP w0.127: U6.8 39.19,15.69 v1(39.88,16.38) 40.13,16.38 40.24,16.5 U7.6 ; U8.6 37.02,26.73 v1(37.08,26.67) ; H8.5 69.09,2.54 70.23,1.4 71.5,1.4 72.01,1.91 72.01,3.17 72.77,3.94 76.58,3.94 79.5,6.86 79.5,12.57 79.16,12.92 R8.1 78.47,15.99 78.99,16.51 H2.1 77.04,19.74 77.04,32.31 72.52,36.83 70.99,36.83 70.26,37.57 70.26,39.22 67.06,42.42 65.48,42.42 65.27,42.21 U16.6 ; v1(16,43.04) 15.74,42.78 U13.6 ; v1(16,43.04) 15.36,43.69 13.59,43.69 13.34,43.94 R12.2 ; v1(16,43.04) 15.25,43.04 15.04,43.25 14.5,43.25 12.32,41.07 12.32,36.58 13.91,34.99 17.21,34.99 19.68,32.51 19.68,26.67 17.65,24.64 v1(17.4,24.64) ; U2.10 34.54,35.18 34.16,35.56 v1(33.78,35.56) 31.88,35.56 31.37,35.05 31.37,32.71 28,29.34 26.04,29.34 v1(25.02,28.32) 25.36,27.98 25.36,27.59 25.86,27.1 U9.2 ; v1(44.96,26.29) 44.64,26.6 U11.6 ; U18.8 12.57,22.48 v1(12.19,22.86) ; v1(20.7,19.94) 20.7,16.76 15.74,11.8 U14.6 ; U15.6 v1(65.27,11.94)
  BOTTOM w0.127: v1(17.4,24.64) 15.62,22.86 v1(12.19,22.86) 11.56,22.23 11.56,21.59 12.83,20.32 20.32,20.32 v1(20.7,19.94) ; v1(25.02,28.32) 24.77,28.57 24.35,28.57 23.49,29.43 23.49,31.37 24.64,32.51 24.64,33.15 24.13,33.66 22.48,33.66 21.59,32.77 20.45,32.77 20.04,33.17 18.01,33.17 16.38,34.8 16.38,42.66 v1(16,43.04) ; v1(33.78,35.56) 34.67,34.67 34.67,29.08 v1(37.08,26.67) 37.08,28.83 35.43,30.48 35.43,33.27 37.15,34.99 41.58,34.99 43.56,33.01 43.56,29.73 44.21,29.08 45.09,29.08 46.04,28.13 46.04,27.37 v1(44.96,26.29) 44.96,21.8 39.88,16.72 v1(39.88,16.38) 40.51,16.38 44.83,20.7 54.23,20.7 61.47,13.46 61.47,12.32 61.85,11.94 62.36,11.94 62.61,12.19 65.02,12.19 v1(65.27,11.94) 65.78,11.43 67.31,11.43 67.69,11.05 67.69,10.29 67.18,9.78 67.18,9.27 67.56,8.89 68.07,8.89 68.83,8.13 68.83,3.05 H8.5
N14002690: length 1.9
  TOP w0.127: C12.1 34.41,24.42 U8.2
N14009218: length 2.1
  TOP w0.127: U5.10 24.5,18.14 C7.1
N14013380: length 2.4
  TOP w0.127: U6.6 34.84,15.03 34.67,14.86 34.04,14.86 33.87,15.03 U6.5
N14046481: length 3.4
  TOP w0.127: U7.1 43.95,15.5 44.07,15.37 R37.1 44.79,14.78 44.79,14.77 R40.2
N14046877: length 1.6
  TOP w0.127: U2.5 33.99,32.2 34.12,32.07 34.42,32.07 34.54,32.2 U2.4
N14048054: length 2.4
  TOP w0.127: U2.1 36.83,33.66 37.21,34.04 C2.2
N14096363: length 1.5
  TOP w0.127: R36.2 D1.C
N14097558: length 15
  TOP w0.127: H7.10 7.37,52.07 14.35,52.07 15.11,51.31 15.11,47.37 15.24,47.24 R11.1
N14097562: length 7.1
  TOP w0.127: R12.1 13.34,47.12 9.65,50.8 H7.9
N14097578: length 4.6
  TOP w0.127: H7.5 19.05,50.55 R14.1
N14097590: length 4.7
  TOP w0.127: R15.1 20.95,48.01 21.34,48.39 H7.4
N14097622: length 5
  TOP w0.127: H7.3 22.86,49.78 R16.1
N14097634: length 4.6
  TOP w0.127: H7.2 26.42,48.13 26.67,47.88 R17.1
N14097646: length 7.1
  TOP w0.127: R10.1 R18.1 30.48,47.88 28.96,49.4 H7.1
N14098075: length 5.1
  TOP w0.127: H6.8 33.02,48.77 34.29,47.5 R19.1
N14098079: length 4.8
  TOP w0.127: R20.1 36.2,50.16 H6.7
N14098086: length 4.5
  TOP w0.127: R21.1 H6.6
N14098098: length 4.5
  TOP w0.127: R22.1 H6.5
N14098110: length 4.5
  TOP w0.127: R23.1 H6.4
N14098122: length 4.5
  TOP w0.127: R24.1 H6.3
N14098134: length 4.5
  TOP w0.127: R25.1 H6.2
N14098146: length 4.5
  TOP w0.127: R26.1 H6.1
N14098493: length 5.3
  TOP w0.127: R27.1 H5.1
N14098497: length 5.3
  TOP w0.127: R28.1 H5.2
N14098504: length 5.3
  TOP w0.127: R29.1 H5.3
N14098516: length 5.3
  TOP w0.127: R30.1 H5.4
N14098528: length 5.6
  TOP w0.127: R31.1 47.5,5.21 48.26,4.45 H5.5
N14098540: length 5.9
  TOP w0.127: R32.1 49.28,6.1 50.8,4.57 H5.6
N14105342: length 2.1
  TOP w0.127: C19.1 40.65,26.68 41.07,27.1 U11.15
N14105886: length 2.1
  TOP w0.127: C22.2 43.55,24.37 43.91,24.74 U11.5
N14107068: length 3.6
  TOP w0.127: U11.7 45.09,27.1 45.12,27.14 R41.2 R34.1
N14121723: length 4.9
  TOP w0.127: R13.1 17.14,49.91 H7.6
N14122965: length 7.6
  TOP w0.127: H10.3 24.9,52.31 24.9,47.89 24.77,47.75 R39.2
N14126545: length 3.5
  TOP w0.127: R35.1 29.38,9.02 29.34,9.07 U12.5
N14207646: length 1.7
  TOP w0.127: U17.3 13.49,17.21 C34.2
N14208918: length 6.6
  TOP w0.127: U18.4 9.52,21.98 9.94,21.55 R46.2 9.94,18.58 9.8,18.44 9.8,16.97 10.01,16.76 U17.7
N14209514: length 7.5
  TOP w0.127: U18.5 7.84,21.48 7.65,21.29 7.65,18.44 9.77,16.31 U17.8
N14210198: length 4
  TOP w0.127: U17.9 10.82,15.68 10.64,15.49 R45.2 8.55,14.3 R44.1
N14210289: length 6.8
  TOP w0.127: U18.3 9.78,22.48 10.41,21.84 10.41,20.95 11.26,20.1 R43.2 11.26,18.76 10.82,18.32 U17.5
N14216212: length 9.7
  TOP w0.229: C38.1 14.73,22.61 14.36,22.98 U18.9 ; C36.1 14.61,23.62 14.46,23.48 U18.10
  TOP w0.381: R42.1 14.73,25.4 15.46,24.68 C36.1 C38.1 15.46,21.59 R47.1
N141214550: length 7.8
  TOP w0.127: H10.1 27.93,52.31 27.93,46.91 R33.2

## Copper pours and planes (outline as drawn; the poured copper is in the pictures)
1.8V on BOTTOM: 10.8,14.61 14.22,14.61 16.13,16.51 16.13,17.53 15.24,18.41 8.89,18.41 8.64,18.16 8.64,16.76
GND on TOP: 3.05,37.72 10.12,37.72 11.05,38.65 11.05,48.72 10.12,49.66 0.51,49.66 0.51,55.37 80.77,55.37 80.77,0.51 3.05,0.51 ; 35 cut-outs
GND on BOTTOM: 17.02,11.68 17.02,10.16 18.67,8.51 21.08,8.51 22.22,9.65 22.22,12.19 21.84,12.57 17.91,12.57
GND on BOTTOM: 3.05,37.72 10.12,37.72 11.05,38.65 11.05,48.72 10.12,49.66 0.51,49.66 0.51,55.37 80.77,55.37 80.77,0.51 3.05,0.51 ; 12 cut-outs
VDD on TOP: 39.37,28.37 39.37,27.81 40.01,27.18 41.78,27.18 42.04,27.43 42.04,28.7 39.7,28.7
VDD on TOP: 74.68,12.19 77.34,12.19 77.34,9.78 78.23,8.89 78.23,6.6 76.33,4.7 72.26,4.7 68.96,1.4 56.77,1.4 56.39,1.78 56.39,5.21 59.69,8.51 62.99,8.51 62.99,8 64.01,8 64.01,8.51 64.52,8.51 64.52,8.76 66.17,8.76 66.17,9.53 73.41,9.53 73.66,9.78 73.66,11.18
VDD on BOTTOM: 13.08,1.4 5.71,8.76 5.71,33.27 6.6,34.16 10.41,34.16 12.57,36.32 12.57,45.47 16.26,49.15 30.61,49.15 30.99,49.53 30.99,50.8 32.77,52.58 65.66,52.58 65.68,52.55 68.48,52.55 69.34,51.69 69.34,50.32 71.5,48.16 71.5,35.69 75.06,32.13 75.06,25.15 79.12,21.08 79.12,9.27 78.23,8.38 74.68,8.38 74.17,8.89 74.17,12.32 70.1,16.38 70.1,18.67 69.22,19.56 68.33,19.56 63.5,24.38 63.5,36.2 63.88,36.58 63.88,41.02 64.52,41.66 65.41,41.66 65.91,41.15 67.06,41.15 67.31,41.4 67.31,42.29 62.74,46.86 42.32,46.86 40.54,45.09 34.54,45.09 33.78,44.32 33.78,43.56 33.27,43.05 32.38,43.05 31.5,43.94 31.5,44.7 31.11,45.09 27.05,45.09 26.67,44.7 17.14,44.7 16,43.56 16,34.92 17.53,33.4 19.43,33.4 20.32,32.51 21.84,32.51 22.73,33.4 24.13,33.4 24.51,33.02 24.51,32.26 23.24,30.99 23.24,28.7 24.13,27.81 26.8,27.81 27.18,28.19 27.18,35.31 28.45,36.58 30.61,36.58 32.77,34.42 41.91,34.42 43.31,33.02 43.31,29.49 43.59,29.21 45.21,29.21 45.59,28.83 45.59,27.05 44.96,26.42 43.81,26.42 42.93,25.53 42.93,21.21 39.01,17.3 39.01,16.48 39.62,15.88 40.01,15.88 43.94,19.81 54.36,19.81 60.83,13.34 60.83,12.06 61.47,11.43 62.74,11.43 62.87,11.56 64.26,11.56 67.56,8.26 67.69,8.26 67.95,8 67.95,4.7 66.93,3.68 62.99,3.68 60.71,5.97 60.32,5.97 60.32,4.45 59.44,3.56 59.44,1.65 59.18,1.4 56.77,1.4 55.12,3.05 52.45,3.05 51.56,3.94 35.94,3.94 35.18,4.7 25.91,4.7 24.13,2.92 24.13,1.78 23.75,1.4 ; 3 cut-outs

## Text on the board
Ref Des/Silkscreen Top: CORNER ACCEL | TEMPERATURE | ACCEL MEM | UV | ALS/PROX | PRESSURE | COLOR | GYRO | HALL | ACCEL+MAG MEM | SENSOR PLATFORM | MULTISENSOR SHIELD BOARD | c 2015 | Made in U.S.A. | Pb
DIMENSION: (6X) | 45 X.025 | 1.505 | 1.935 | 2.200 | 0 | 3.200 | .900 | 1.300 | .100 | .315 | 1.800 | 2.100 | 3.100
LOGO_OUTLINE_M: SHEET:
User.7: 2 OF 2 | ASSEMBLY | SECONDARY-SIDE
User.9: 14. Rounding is allowed on 90 degree corners with the size of | 12. Inside corners should be rounded-off | 13. Changes to board geometries and apertures are not | 10. Bow and Twist | 11. Inspection | standard routing bit. | allowed unless they are approved by customer. | 4. Drilling | 5. Finish | 9. Packaging | 8. Cleanliness | 7. Electrical Test | 3. Soldermask | photoimageable soldermask, 003 max. thickness. | Soldermask over bare copper. | Soldermask is allowed in via holes. | Bow and twist to be .007 IN/IN or .090 max according to IPC-A-600D. | NOTES: | 2. Material | 6. Silkscreen | to conduct a thorough review of the artwork and media for | writing (in advance of manufacturing) of any changes, revisions,or | 1. Specifications. | as meaxured by the omega meter 600SMD. | A. All hole diameters are finished sizes. | B. All hole to be +/- .003 from true position unless otherwise specified. | C. All hole diameters to be +/- .003 unless otherwise specified. | D. An NC drill file has been supplied - see drill table. | A. Plate thru with copper .0010 min to .002 max. thickness drill size | dimension apply after plating. | B. Use gold immersion over nickel. | C. Finished boards shall not have nicks, | scratches, voids, exposed copper, poor plating, all misdrilled holes. | manufacturability in the supplier's process compliance to all | A. Boards shall be free of fiber glass dust or any other foreign material. | B. Finished boards must conform to 0.01 MG/IN max NAcL ionic contamination | A. All boards shall be 100% electrically tested for opens/short at 10 volts. | MIL-SPEC boards to be tested at 40 volts. | B. Apply test stamp in non-legend area on solder side of PCB. | C. Test is required on both sides of the board. | Solder mask both sides with (green color) liquid | A. FR4. | B. Color to be opaque. | A. Silkscreen using white non-conductive epoxy or equivalent (both sides). | B. No silkscreen allowed on exposed lands. | C. Silkscreen must be a minimum of 3mm away form fiducial marks. | D. Minimum clearance between silkscreen legend and vias, pads, or holes | to be .005. | E. Silkscreen is allowed in via holes. | There shall be a max of 25 units per package, individually wrapped, | and shipped in cardboard cratons with sufficient surrounding | material to prevend shipping damage. | A.Automatic optical inspection of all layers required. | B.The impedance should be controlled by stackup layer. | gerber and drill data when applicable. | A. Fabricate IAW  IPC600, latest revision. | B. Producibility study - It is the respondsibility  of the supplier | corrections made or recommendations to ensure conformance to | D. This drawing is to be used in conjunction with the provided | E. All notes are "Unless Otherwise Specified." | standards, and of  any specifications that  cannot be met. | applicable specifications. Customer must be advised in
User.11: 6 | 5 | 16 | 9 | 17 | 8 | 1 | 24 | 32 | 2 | 4 | 3 | LED7 | LED0 | 25
User.33: LAYER STACKING DETAIL | Total Overal Thickness: | Material Ordering Info (used in lieu of Fasttrak data) | Panel Size | Number Up | Number of Parts Due | Prepregs Construction Added? | Material Ply Specified | Material Type (ie Nelco-29, 370 HR, ...) | Layer # | Plate | 1 | 2 | Layer | Type | SIG | Copper | Weight | (Oz) | 0.5 | Thickness | (Mils) | 62.00+/-10% | 1.35 | 0.65 | Material | Type - Ply | Prepreg | Mils | Dielectric | ______ | FR4 | 58.00
User.36: FIGURE | SIZE | 12.0 | 40.0 | 125.0 | 150.0 | DRILL CHART: TOP to BOTTOM | ALL UNITS ARE IN MILS | TOLERANCE | +3.0/-10.0 | +3.0/-3.0 | PLATED | QTY | 292 | 96 | 4 | 1
